# EAGLE board vcu (EAGLE 9.5.2)
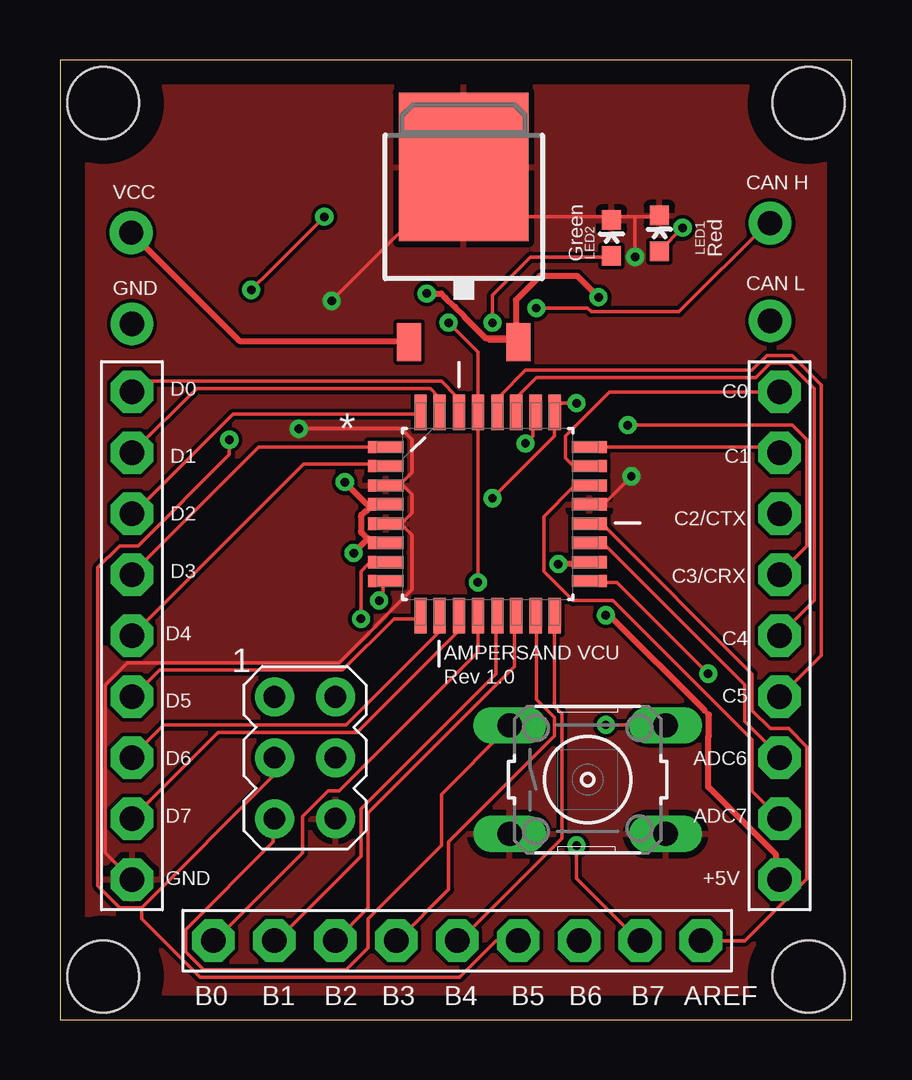
[diagram p0: board, top side]
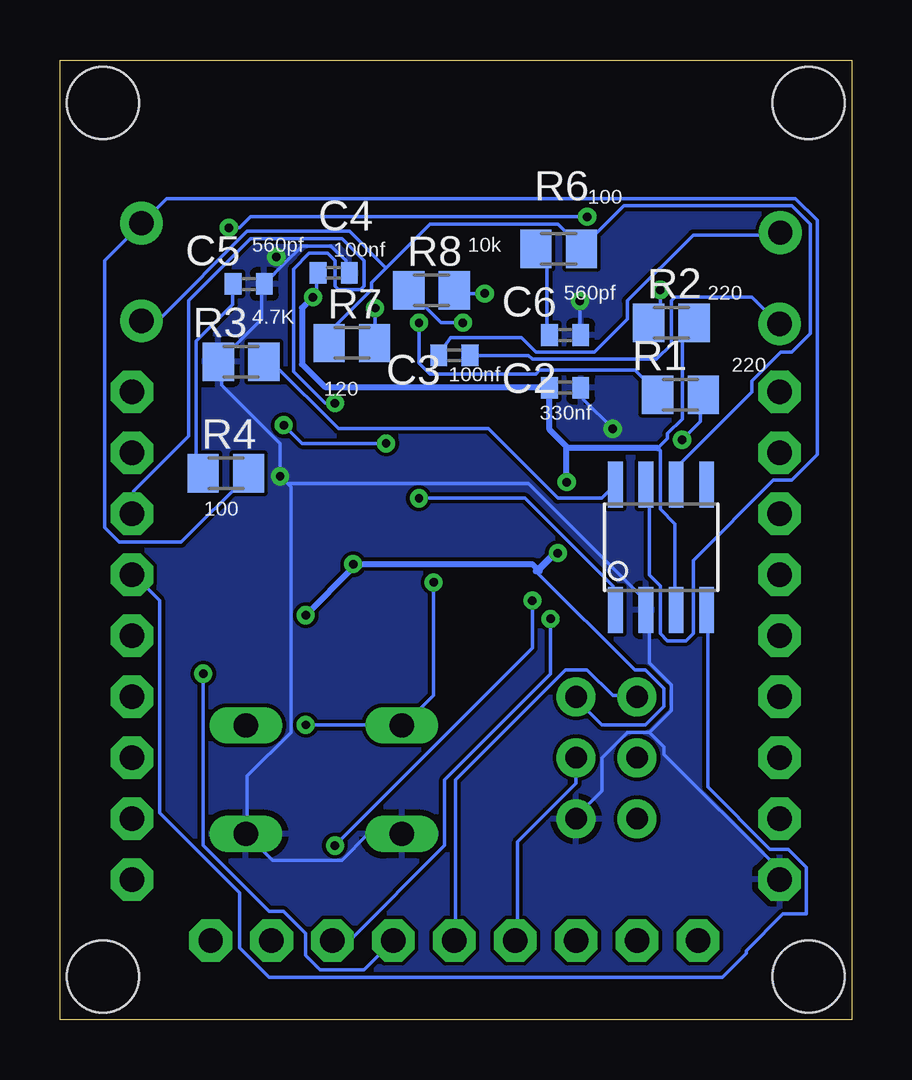
[diagram p1: board, bottom side, seen from below]

Size 33 x 40 mm. Coordinates in mm from the lower left corner, seen from the top.
Outline: 0,0 33,0 33,40 0,40 0,0
Copper layers (1*16): Top 0.035mm / dielectric 1.5mm / Bottom 0.035mm
Design rules "default": minimum track width 6mil, minimum drill 0.35mm, track to track 6mil, track to pad 6mil, pad to pad 6mil, via to via 6mil, smd to smd 6mil, copper to edge 40mil, drill to drill 6mil, minimum pad ring 10mil, minimum via ring 8mil, stop-mask expansion 4mil, vias tented up to drill 0mil, thermal gap 10mil
Holes 3 mm at 1.8,38.2 31.2,38.2 31.2,1.8 1.8,1.8

## Footprints (pad centres in the part's own frame; a part is rotated, then mirrored left to right if it is on the bottom)
C0402 = smd 0.7 x 0.9: 1 -0.65,0; 2 0.65,0
TO252 = smd 1 x 1.6: 1 -2.28,-4.8; 2 2.28,-4.8 | smd 5.4 x 6.2: 3 0,2.5
SO08 = smd 0.61 x 1.905: 1 -1.905,-2.616; 2 -0.635,-2.616; 3 0.635,-2.616; 4 1.905,-2.616; 5 1.905,2.616; 6 0.635,2.616; 7 -0.635,2.616; 8 -1.905,2.616
AVRISP = drill 0.9 pad 1.626: 1 -1.27,2.54; 2 1.27,2.54; 3 -1.27,0; 4 1.27,0; 5 -1.27,-2.54; 6 1.27,-2.54
1X01-CLEANBIG = drill 1.016 pad 1.778: 1 0,0
1X09-BIG = drill 1.016 pad 1.778 octagon: 1 -10.16,0; 2 -7.62,0; 3 -5.08,0; 4 -2.54,0; 5 0,0; 6 2.54,0; 7 5.08,0; 8 7.62,0; 9 10.16,0
LED-0603 = smd 0.8 x 0.8: A 0,-0.75; C 0,0.75
M0805 = smd 1.3 x 1.6: 1 -0.95,0; 2 0.95,0
B3F-10XX = drill 1.016 long: 1 -3.251,2.261; 2 3.251,2.261; 3 -3.251,-2.261; 4 3.251,-2.261
QFP80P900X900X120-32N = smd 1.473 x 0.508: 1 -4.242,2.794; 2 -4.242,2.007; 3 -4.242,1.194; 4 -4.242,0.406; 5 -4.242,-0.406; 6 -4.242,-1.194; 7 -4.242,-2.007; 8 -4.242,-2.794; 17 4.242,-2.794; 18 4.242,-2.007; 19 4.242,-1.194; 20 4.242,-0.406; 21 4.242,0.406; 22 4.242,1.194; 23 4.242,2.007; 24 4.242,2.794 | smd 0.508 x 1.473: 9 -2.794,-4.242; 10 -2.007,-4.242; 11 -1.194,-4.242; 12 -0.406,-4.242; 13 0.406,-4.242; 14 1.194,-4.242; 15 2.007,-4.242; 16 2.794,-4.242; 25 2.794,4.242; 26 2.007,4.242; 27 1.194,4.242; 28 0.406,4.242; 29 -0.406,4.242; 30 -1.194,4.242; 31 -2.007,4.242; 32 -2.794,4.242

## Placement (x,y rotation side)
C2  330nf  [C0402]  11.94,26.34 0 bottom
C3  100nf  [C0402]  16.56,27.69 0 bottom
C4  100nf  [C0402]  21.59,31.12 0 bottom
C5  560pf  [C0402]  25.13,30.66 0 bottom
C6  560pf  [C0402]  11.94,28.53 0 bottom
IC1  7812DT  [TO252]  16.83,33.04 0 top
IC2  MCP2551/SN  [SO08]  7.94,19.69 0 bottom
ISP1  AVRISP-6  [AVRISP]  10.21,10.91 0 top
JP1  [1X01-CLEANBIG]  2.97,32.8 0 top
JP2  CAN H  [1X01-CLEANBIG]  29.61,33.2 0 top
JP3  CAN L  [1X01-CLEANBIG]  29.61,29.12 0 top
JP4  [1X09-BIG]  30,16 270 top
JP5  [1X09-BIG]  3,16 270 top
JP6  [1X09-BIG]  16.56,3.29 0 top
JP7  [1X01-CLEANBIG]  3,29 0 top
LED1  Red LED  [LED-0603]  24.99,32.77 0 top
LED2  Green LED  [LED-0603]  22.99,32.58 0 top
R1  220  [M0805]  7.13,26.04 0 bottom
R2  220  [M0805]  7.51,29.04 0 bottom
R3  4.7k  [M0805]  25.45,27.42 0 bottom
R4  100  [M0805]  26.08,22.77 0 bottom
R6  100  [M0805]  12.21,32.12 0 bottom
R7  120  [M0805]  20.83,28.2 0 bottom
R8  10k  [M0805]  17.51,30.39 0 bottom
S1  [B3F-10XX]  22,10 0 top
U1  ATMEGA328P-AU  [QFP80P900X900X120-32N]  17.83,21.07 0 top

## Library data of the parts
C2-C6 ISP1 JP1-JP7 R1-R4 R6-R8 = adafruit
IC1 = linear
IC2 = microchip-dspic
LED1 LED2 = SparkFun
S1 = switch-omron; MPN: B3F-1000; OC_FARNELL: 176432; OC_NEWARK: 36M3542
U1 = Atmel-ATMEGA328P-AU; DESCRIPTION: 8-bit Microcontroller with In-System Programmable Flash; MPN: ATMEGA328P-AU; OC_FARNELL: 1715486; OC_NEWARK: 14R4631; PACKAGE: TQFP-32; SUPPLIER: Atmel

## Nets
+5V: C2.1 C4.1 IC1.2 IC2.3 ISP1.2 JP4.9 R2.2 R8.2 U1.4 U1.6 U1.18
ADC6: JP4.7 U1.19
ADC7: JP4.8 U1.22
AREF: JP6.9 U1.20
B0: JP6.1 U1.12
B1: JP6.2 U1.13
B2: JP6.3 U1.14
B3/MOSI: ISP1.4 JP6.4 U1.15
B4/MISO: ISP1.1 JP6.5 U1.16
B5/SCK: ISP1.3 JP6.6 R1.2 U1.17
B6: JP6.7 U1.7
B7: JP6.8 U1.8
C0: JP4.1 U1.23
C1: JP4.2 U1.24
C2/CTX: IC2.1 JP4.3 U1.25
C3/CRX: IC2.4 JP4.4 U1.26
C4: JP4.5 U1.27
C5: JP4.6 U1.28
D0: JP5.1 U1.30
D1: JP5.2 U1.31
D2: JP5.3 U1.32
D3: JP5.4 U1.1
D4: JP5.5 U1.2
D5: JP5.6 U1.9
D6: JP5.7 U1.10
D7: JP5.8 U1.11
GND: C2.2 C4.2 C5.2 C6.2 IC1.3 IC2.2 ISP1.6 JP5.9 LED1.C LED2.C R3.1 S1.3 S1.4 U1.3 U1.5 U1.21
N$1: C3.2 JP7.1
N$2: C3.1 IC1.1 JP1.1
N$8: LED1.A R2.1
N$9: LED2.A R1.1
N$39: IC2.7 JP2.1 R4.2 R7.2
N$40: IC2.6 JP3.1 R6.2 R7.1
N$41: C6.1 R6.1
N$42: C5.1 R4.1
N$43: IC2.8 R3.2
RESET: ISP1.5 R8.1 S1.1 S1.2 U1.29

## Tracks (layer width: path | path; a pad name or v marks a point on that pad's centre or on a via)
+5V  (via drill 0.35)
  Top 0.152: 16.08,30.08 17.88,28.28 19,28.28 19.1,28.28 IC1.2 | 13,19.9 12.85,20.05 12.55,20.36 12.55,20.97 | 13,21.43 13.46,21.43 U1.4 13,21.43 | 27.02,12.74 26.88,12.88 | 22.91,16.85 v22.76,16.85 | 11.94,22.34 12.85,21.43 13,21.43
  Top 0.254: JP4.9 29.86,5.98 29.86,6.86 27.02,9.69 27.02,11.8 27.05,11.83 27.05,12.71 27.02,12.74 | 26.88,12.88 22.91,16.85 | U1.18 22,18.99 v20.78,18.99 | 13.03,19.88 13,19.9 | U1.6 13.03,19.88 | 12.57,20.33 12.57,20.29 12.99,19.88 13.03,19.88 | 12.55,20.36 12.57,20.33 | 12.57,20.33 12.57,20.94 12.55,20.97 12.57,20.99 12.57,21.03 12.74,21.2 12.77,21.2 13,21.43 | U1.4 12.8,21.48 11.94,22.34 v11.88,22.4 | 12.85,20.05 v12.24,19.44 | v22.45,30.11 21.56,31 20,31 19,30 19,28.28 | IC1.2 18.96,28.39 17.76,28.39 16.86,29.29 16.86,29.32 16.48,29.7 16.46,29.7 16.08,30.08 15.9,30.27 v15.29,30.27
  Bottom 0.152: R2.2 6.6,28.89 7.06,28.44 7.06,25.03 7.67,24.42 7.67,24.23 8.08,23.82 7.98,23.71 7.98,21.27 7.36,20.66 7.36,17.16 IC2.3 | C4.1 22.3,31.03 22.3,30.11 v22.45,30.11 | 12.61,26.37 C2.1 | v15.29,30.27 16.51,30.27 R8.2 | ISP1.2 11.48,13.35 10.41,12.28 8.58,12.28 7.82,13.04 7.82,13.81 8.58,14.57 9.04,14.57 13.16,18.68 13,18.68 v12.24,19.44
  Bottom 0.254: v22.76,16.85 20.78,18.84 v20.78,18.99 13.31,18.99 13,18.68 | v12.24,19.44 12.39,19.44 13.16,18.68 | v22.45,30.11 22.91,29.66 22.91,27.32 21.95,26.37 12.61,26.37 | C2.1 12.59,24.59 11.88,23.88 | 8.08,23.82 11.82,23.82 11.88,23.88 | v11.88,22.4 11.88,23.88
ADC6
  Top 0.152: U1.19 22.15,19.75 22.76,19.75 28.55,13.96 28.55,12.43 29.92,11.06 JP4.7
ADC7
  Top 0.152: U1.22 22,22.19 21.39,22.19 20.17,20.97 20.17,18.68 21.39,17.46 23.06,17.46 28.85,11.67 28.85,9.54 29.92,8.47 JP4.8
AREF
  Top 0.152: U1.20 22.6,20.66 28.85,14.41 28.85,12.89 29.62,12.13 30.38,12.13 31.14,11.37 31.14,5.87 28.56,3.29 JP6.9
B0
  Top 0.152: U1.12 17.42,15.33 11.63,9.54 11.18,9.54 10.11,8.47 10.11,6.95 6.45,3.29 JP6.1
B1
  Top 0.152: U1.13 18.19,16.7 18.19,14.41 12.55,8.78 12.55,6.8 9.04,3.29 JP6.2
B2
  Top 0.152: JP6.3 12.85,4.66 12.85,8.62 18.95,14.72 18.95,16.7 U1.14
B3/MOSI
  Top 0.152: U1.15 19.86,16.7 19.86,13.35 20.62,12.59 20.62,11.82 16.2,7.41 16.2,5.42 14.07,3.29 JP6.4
  Bottom 0.152: ISP1.4 11.48,9.84 13.92,7.41 13.92,3.29 JP6.4
B4/MISO
  Top 0.152: U1.16 20.62,13.04 20.93,12.74 20.93,7.56 16.66,3.29 JP6.5
  Bottom 0.152: ISP1.1 9.04,13.5 9.96,13.5 11.02,14.57 11.94,14.57 16.51,10 16.51,3.29 JP6.5
B5/SCK  (via drill 0.35)
  Top 0.152: v27.02,14.41 23.22,18.23 22.15,18.23 U1.17 | v7.06,24.17 7.06,23.56 3.25,19.75 2.49,19.75 1.57,18.84 1.57,5.58 2.49,4.66 3.4,4.66 | 3.4,4.66 8.89,10.15 8.89,10.91 ISP1.3 | JP6.6 18.19,3.29 16.66,1.77 5.84,1.77 3.4,4.2 3.4,4.66
  Bottom 0.152: v27.02,14.41 27.02,7.25 24.28,4.51 23.67,4.51 22.76,3.59 22.76,2.68 22.15,2.07 20.32,2.07 JP6.6 | v7.06,24.17 6.3,24.93 6.3,26 R1.2
B6  (via drill 0.35)
  Top 0.152: v12.55,16.7 12.55,18.68 12.85,18.99 13.46,18.99 U1.7
  Bottom 0.152: v12.55,16.7 12.55,14.41 16.97,10 16.97,7.25 20.93,3.29 JP6.7
B7  (via drill 0.35)
  Top 0.152: v13.31,17.46 13.46,17.62 13.46,18.23 U1.8 | v21.54,7.25 21.54,5.88 24.13,3.29 JP6.8
  Bottom 0.152: v13.31,17.46 13.31,15.48 v21.54,7.25
C0
  Top 0.152: U1.23 22,23.1 21.39,23.1 21.08,23.41 21.08,24.32 22.91,26.15 29.92,26.15 JP4.1
C1
  Top 0.152: U1.24 29.77,23.86 29.92,23.71 JP4.2
C2/CTX  (via drill 0.35)
  Top 0.152: v18.03,21.73 20.62,24.32 U1.25 20.62,25.39 20.93,25.69 v21.54,25.69
  Bottom 0.152: v18.03,21.73 13.61,21.73 9.96,18.07 9.96,17.16 IC2.1 | v21.54,25.69 21.94,25.69 23.26,27.02 23.26,31.28 22.6,31.94 21.84,31.94 21.54,31.64 21.54,30.57 21.39,30.42 20.47,30.42 20.32,30.57 20.32,31.64 21.23,32.55 25.04,32.55 27.63,29.96 27.63,24.32 29.92,22.03 29.92,21.12 JP4.3
C3/CRX  (via drill 0.35)
  Top 0.152: v19.41,24.02 19.71,24.32 19.71,25.24 U1.26 | v23.67,24.78 30.53,24.78 31.14,24.17 31.14,19.75 30.07,18.68 JP4.4
  Bottom 0.152: v19.41,24.02 22.91,24.02 v23.67,24.78 | IC2.4 5.99,17.01 5.99,9.69 3.4,7.1 2.64,7.1 1.88,6.34 1.88,4.4 2.87,4.4 4.39,2.87 4.39,2.76 5.38,1.77 24.28,1.77 25.5,2.98 25.5,5.27 28.85,8.62 28.85,17.46 29.92,18.53 JP4.4
C4
  Top 0.152: U1.27 19.1,25.39 19.1,26 19.86,26.76 29.01,26.76 29.62,27.37 30.38,27.37 31.44,26.3 31.44,17.46 30.07,16.09 JP4.5
C5
  Top 0.152: U1.28 18.34,25.39 18.34,26 19.41,27.06 28.85,27.06 29.46,27.67 30.53,27.67 31.75,26.45 31.75,15.18 30.07,13.5 JP4.6
D0
  Top 0.152: U1.30 16.51,25.39 16.51,26 15.9,26.61 3.4,26.61 3.1,26.3 JP5.1
D1
  Top 0.152: U1.31 15.75,25.39 15.75,26 15.44,26.3 5.69,26.3 3.1,23.71 JP5.2
D2
  Top 0.152: U1.32 14.98,25.24 7.21,25.24 3.1,21.12 JP5.3
D3
  Top 0.152: U1.1 8.28,23.86 3.1,18.68 JP5.4
D4
  Top 0.152: U1.2 13.52,23.15 10.16,23.15 3.1,16.09 JP5.5
D5
  Top 0.152: U1.9 14.98,16.7 13.92,16.7 11.79,14.57 4.16,14.57 3.1,13.5 JP5.6
D6
  Top 0.152: U1.10 15.75,16.7 15.75,16.09 11.94,12.28 4.32,12.28 3.1,11.06 JP5.7
D7
  Top 0.152: U1.11 16.51,16.7 16.51,16.09 12.39,11.98 6.6,11.98 3.1,8.47 JP5.8
GND  (via drill 0.35)
  Top 0.152: v9.96,24.63 14.22,24.63 14.68,24.17 14.68,22.8 14.22,22.34 | 14.22,22.34 13.61,22.34 U1.3 14.22,22.34 | 14.22,20.66 14.68,21.12 14.68,21.88 14.22,22.34 | 14.22,20.66 14.68,20.21 14.68,17.92 11.63,14.87 2.79,14.87 1.88,13.96 1.88,6.95 2.95,5.88 JP5.9 | 14.22,20.66 U1.5 | 23.98,33.47 24.89,33.47 LED1.C | 23.98,33.47 23.06,33.47 LED2.C 22.91,33.47 18.95,33.47 16.97,35.45 IC1.3 16.81,35.45 v11.33,29.96 | v23.82,22.65 22.76,21.58 22.15,21.58 U1.21 | v23.98,31.79 23.98,33.47
  Bottom 0.152: v9.96,24.63 11.18,25.84 11.18,26.3 C2.2 | 8.43,11.98 7.52,12.89 7.52,13.96 8.43,14.87 8.43,17.01 IC2.2 8.58,17.16 8.58,17.46 13.46,22.34 23.52,22.34 | 8.43,11.98 9.35,11.98 10.41,10.91 10.41,9.54 11.48,8.47 ISP1.6 | 8.43,11.98 7.82,11.37 7.82,11.06 3.1,6.34 3.1,5.88 JP5.9 | v11.33,29.96 11.33,28.59 C6.2 | S1.3 18.8,7.71 20.17,7.71 21.23,6.64 24.13,6.64 25.2,7.71 S1.4 25.2,7.86 25.2,10.15 23.37,11.98 23.37,22.19 23.52,22.34 | 23.67,31.48 24.43,30.72 C5.2 24.59,30.57 24.59,29.2 26.26,27.52 R3.1 26.26,27.37 26.26,26.45 23.82,24.02 v23.82,22.65 23.52,22.34 | 23.67,31.48 22.91,32.25 21.69,32.25 21.08,31.64 21.08,31.18 C4.2 | 23.67,31.48 v23.98,31.79
  pour Top: 0,40 33,40 33,0 0,0
  pour Bottom: 0,40 33,40 33,0 0,0
N$1
  Bottom 0.152: C3.2 15.89,27.67 13.46,27.67 13.31,27.52 8.13,27.52 7.52,28.13 7.52,29.96 7.36,30.11 4.16,30.11 3.1,29.05 JP7.1
N$2
  Top 0.254: IC1.1 14.51,28.28 7.49,28.28 JP1.1
  Bottom 0.152: C3.1 16.71,28.44 13.77,28.44 13.16,27.83 10.72,27.83 9.35,29.2 9.35,29.96 6.6,32.7 3.1,32.7 JP1.1
N$8  (via drill 0.35)
  Top 0.152: v25.96,33.01 25.04,32.09 LED1.A | v7.98,30.42 8.78,31.22 v11.02,33.47
  Bottom 0.152: v25.96,33.01 25.5,33.01 25.04,33.47 v11.02,33.47 | v7.98,30.42 7.98,29.5 8.43,29.05 R2.1
N$9  (via drill 0.35)
  Top 0.152: v18.03,29.05 18.03,30.2 19.62,31.79 22.91,31.79 LED2.A
  Bottom 0.152: v18.03,29.05 18.03,27.37 17.58,26.91 13.16,26.91 13,27.06 9.04,27.06 8.13,26.15 R1.1
N$39  (via drill 0.35)
  Top 0.152: v19.86,29.66 22,29.66 22.15,29.5 25.81,29.5 29.46,33.16 JP2.1
  Bottom 0.152: R4.2 25.2,22.65 27.94,19.9 30.53,19.9 31.14,20.51 31.14,31.64 29.62,33.16 JP2.1 29.46,33.31 28.55,34.23 2.34,34.23 1.42,33.31 1.42,23.56 2.49,22.49 3.25,22.49 6.6,19.14 6.6,16.09 6.91,15.79 7.67,15.79 7.98,16.09 7.98,18.07 8.43,18.53 8.43,22.19 IC2.7 | v19.86,29.66 19.86,28.28 R7.2
N$40
  Bottom 0.152: 19.41,31.33 20.01,30.72 20.01,30.42 21.69,28.74 21.69,28.28 R7.1 | 19.41,31.33 17.58,33.16 12.24,33.16 11.33,32.25 R6.2 11.18,32.25 9.5,33.92 2.49,33.92 1.73,33.16 1.73,28.59 2.49,27.83 2.95,27.83 4.16,26.61 4.16,26.15 7.21,23.1 7.21,22.34 IC2.6 | 19.41,31.33 20.93,32.86 25.2,32.86 28.85,29.2 29.46,29.2 JP3.1
N$41
  Bottom 0.152: C6.1 12.7,28.59 12.7,31.64 13.16,32.09 R6.1
N$42
  Bottom 0.152: C5.1 25.81,30.57 25.81,29.81 27.33,28.28 27.33,22.95 27.18,22.8 R4.1
N$43
  Bottom 0.152: R3.2 24.43,27.37 24.13,27.37 21.39,24.63 15.14,24.63 12.24,21.73 10.41,21.73 9.96,22.19 IC2.8
RESET  (via drill 0.35)
  Top 0.152: v16.2,29.05 17.42,27.83 U1.29 v17.42,18.23 | v22.76,12.28 25.2,12.28 S1.2 | ISP1.5 8.89,8.32 8.89,7.41 5.23,3.75 5.23,2.83 5.99,2.07 11.94,2.07 12.85,2.98 12.85,4.2 15.9,7.25 15.9,9.39 18.64,12.13 S1.1
  Bottom 0.152: v16.2,29.05 17.12,29.05 18.34,30.27 R8.1 | v22.76,12.28 18.8,12.28 S1.1 18.64,12.28 17.42,13.5 v17.42,18.23

## Text on the board
tNames: CAN H | VCC | Green | Red | GND | CAN L | D0 | C0 | D1 | C1 | D2 | C2/CTX | D3 | C3/CRX | D4 | C4 | AMPERSAND VCU | Rev 1.0 | D5 | C5 | D6 | ADC6 | D7 | ADC7 | GND | +5V | B0 | B1 | B2 | B3 | B4 | B5 | B6 | B7 | AREF
bNames: 100 | 10k | 100nf | 560pf | 220 | 560pf | 4.7K | 220 | 100nf | 120 | 330nf | 100